# EAGLE board Cree_XP-E_Turn (EAGLE 6.4)
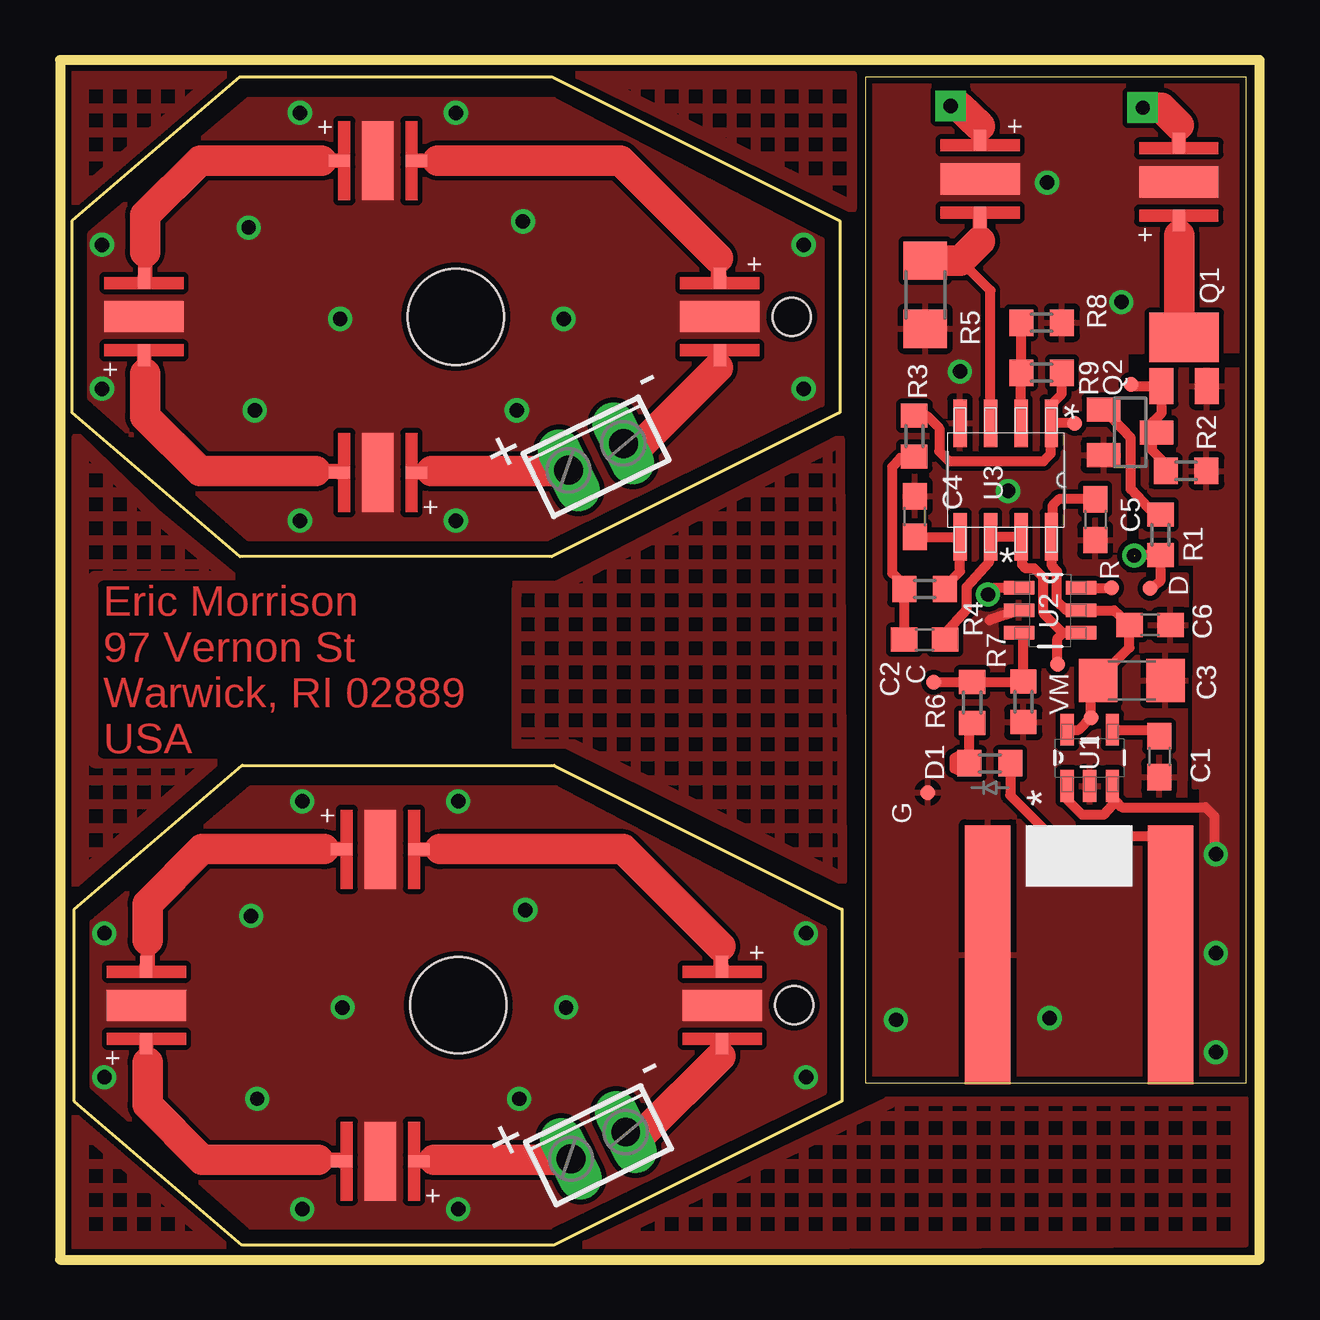
[diagram p0: board, top side]
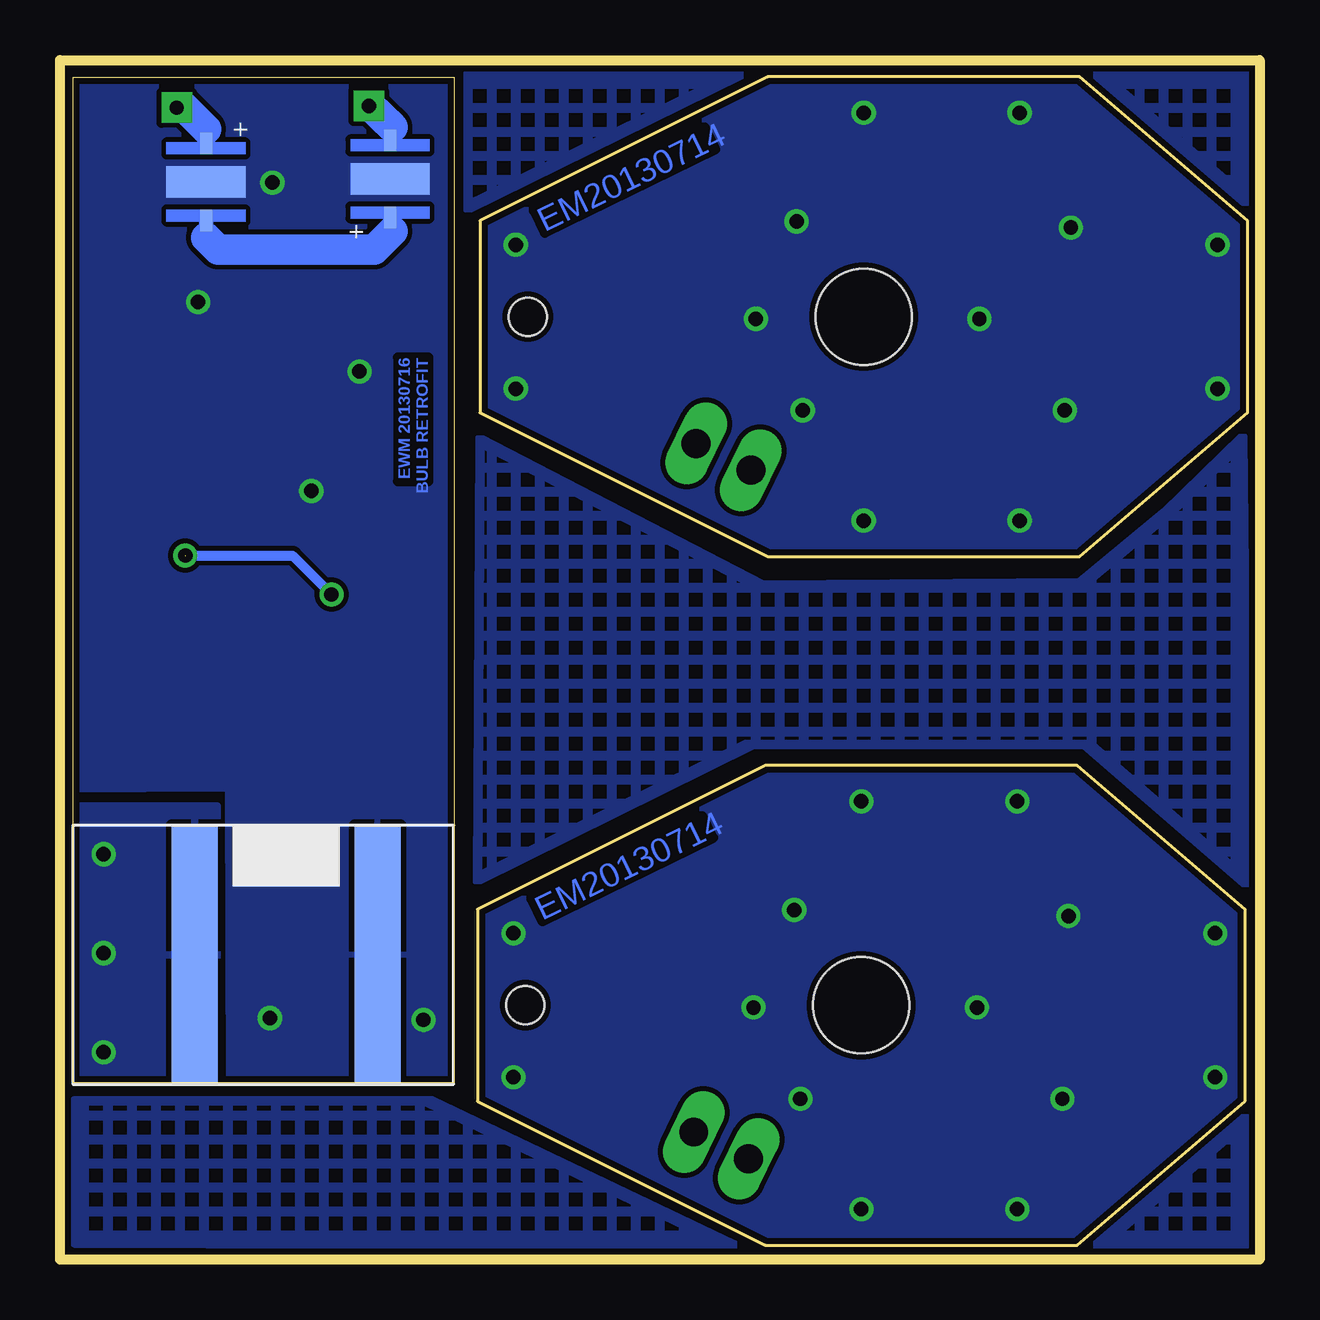
[diagram p1: board, bottom side, seen from below]

Size 50 x 50 mm. Coordinates in mm from the lower left corner, seen from the top.
Outline: 7.6,0.6 0.6,6.6 0.6,14.6 7.6,20.6 20.6,20.6 32.6,14.6 32.6,6.6 20.6,0.6 7.6,0.6
Outline: 0,0 50,0 50,50 0,50 0,0
Outline: 7.5,29.3 0.5,35.3 0.5,43.3 7.5,49.3 20.5,49.3 32.5,43.3 32.5,35.3 20.5,29.3 7.5,29.3
Outline: 49.45,7.37 49.45,49.28 33.58,49.28 33.58,7.37 49.45,7.37
Copper layers (1*16): Top 0.035mm / dielectric 1.5mm / Bottom 0.035mm
Design rules "default *": minimum track width 10mil, minimum drill 24mil, track to track 8mil, track to pad 8mil, pad to pad 8mil, via to via 8mil, smd to smd 8mil, copper to edge 10mil, drill to drill 10mil, minimum pad ring 10mil, minimum via ring 8mil, stop-mask expansion 4mil, vias tented up to drill 0mil, thermal gap 10mil
Holes 4 mm at 16.6,10.6 16.5,39.3
Holes 1.59 mm at 30.6,10.6 30.5,39.3

## Footprints (pad centres in the part's own frame; a part is rotated, then mirrored left to right if it is on the bottom)
TPI_PAD = smd 0.635 x 0.635: P$1 0,0
C0603 = smd 1.1 x 1: 1 -0.85,0; 2 0.85,0
C1206 = smd 1.6 x 1.8: 1 -1.4,0; 2 1.4,0
D0603 = smd 1 x 1.1: 1A -0.85,0; 2C 0.85,0
CREE_XP-E = smd 0.9 x 0.5: AN -1.6,0; CT 1.6,0 | smd 1.3 x 3.3: TH 0,0
SOT-23_POWER = smd 1 x 1.5: P$1 -0.95,-2.025; P$2 0.95,-2.025 | smd 2.9 x 2.05: P$3 0,0
SOT23 = smd 1 x 1.4: 1 -0.95,-1.1; 2 0.95,-1.1; 3 0,1.1
R0603 = smd 1 x 1.1: 1 -0.85,0; 2 0.85,0
R1206 = smd 1.6 x 1.803: 1 -1.422,0; 2 1.422,0
SOT95P280X145-5N = smd 1.321 x 0.559: 1 -1.168,0.94; 2 -1.168,0; 3 -1.168,-0.94; 4 1.168,-0.94; 5 1.168,0.94
SOT95P280X145-6N = smd 1.27 x 0.559: 1 -1.295,0.94; 2 -1.295,0; 3 -1.295,-0.94; 4 1.295,-0.94; 5 1.295,0; 6 1.295,0.94
SOIC8-N_MC = smd 1.981 x 0.559: 1 -2.362,1.905; 2 -2.362,0.635; 3 -2.362,-0.635; 4 -2.362,-1.905; 5 2.362,-1.905; 6 2.362,-0.635; 7 2.362,0.635; 8 2.362,1.905
TAILLIGHT = smd 1.905 x 10.795 bottom: H1 -4.763,0; L2 2.857,0 | smd 1.905 x 10.795: H2 4.763,0; L1 -2.857,0
2POL254 = drill 1.2 long: 1 -1.27,0; 2 1.27,0

## Placement (x,y rotation side)
+5V  TPI  [TPI_PAD]  42.98,22.59 90 top
C1  10n  [C0603]  45.82,20.96 270 top
C2  .1u  [C0603]  36.04,25.84 180 top
C3  47u  [C1206]  44.68,24.14 0 top
C4  .1u  [C0603]  35.63,30.97 90 top
C5  .1u  [C0603]  43.15,30.84 270 top
C6  .1u  [C0603]  45.44,26.45 0 top
D1  DIODE_0603  [D0603]  38.76,20.68 180 top
DRILEGEND  [DRILEGEND]  -0.2,-4.01 0 top  (outside the outline)
GND  TPI  [TPI_PAD]  36.17,19.46 90 top
LED1  LUXEON_REBELCREE_XP-E  [CREE_XP-E]  27.6,10.6 270 top
LED2  LUXEON_REBELCREE_XP-E  [CREE_XP-E]  13.35,17.1 0 top
LED3  LUXEON_REBELCREE_XP-E  [CREE_XP-E]  3.6,10.6 90 top
LED4  LUXEON_REBELCREE_XP-E  [CREE_XP-E]  13.35,4.1 180 top
LED5  LUXEON_REBELCREE_XP-E  [CREE_XP-E]  27.5,39.3 270 top
LED6  LUXEON_REBELCREE_XP-E  [CREE_XP-E]  13.25,45.8 0 top
LED7  LUXEON_REBELCREE_XP-E  [CREE_XP-E]  3.5,39.3 90 top
LED8  LUXEON_REBELCREE_XP-E  [CREE_XP-E]  13.25,32.8 180 top
LED9  LUXEON_REBELCREE_XP-E  [CREE_XP-E]  46.63,44.91 90 top
LED10  LUXEON_REBELCREE_XP-E  [CREE_XP-E]  43.91,44.91 270 bottom
LED11  LUXEON_REBELCREE_XP-E  [CREE_XP-E]  36.24,45.04 90 bottom
LED12  LUXEON_REBELCREE_XP-E  [CREE_XP-E]  38.35,45.04 270 top
MEASURE  TPI  [TPI_PAD]  41.58,24.82 90 top
OUTA  TPI  [TPI_PAD]  42.29,34.85 90 top
PWM  TPI  [TPI_PAD]  44.65,36.48 90 top
Q1  SI2301CDS  [SOT-23_POWER]  46.86,38.44 0 top
Q2  BC846  [SOT23]  44.6,34.47 270 top
R1  10k  [R0603]  45.87,30.21 90 top
R2  1k  [R0603]  46.94,32.87 180 top
R3  3.9k  [R0603]  35.61,34.32 270 top
R4  3.9k  [R0603]  36.04,27.95 0 top
R5  .1  [R1206]  36.07,40.21 90 top
R6  3.3k  [R0603]  38.02,23.22 270 top
R7  1k  [R0603]  40.16,23.25 270 top
R8  1k  [R0603]  40.92,39.05 0 top
R9  28.7K  [R0603]  40.92,36.96 180 top
RESET  TPI  [TPI_PAD]  43.84,28 90 top
TPICLK  TPI  [TPI_PAD]  36.42,24.06 90 top
TPIDATA  TPI  [TPI_PAD]  45.44,27.97 90 top
U1  SPX5205M5-L-3-3  [SOT95P280X145-5N]  42.92,20.91 90 top
U2  ATTINY5-TSHR  [SOT95P280X145-6N]  41.27,27.06 0 top
U3  MCP6L2-X_SN  [SOIC8-N_MC]  39.42,32.49 270 top
U$1  CON_TAILLIGHT  [TAILLIGHT]  41.53,12.71 0 bottom
X1  [2POL254]  22.44,4.76 26 top
X2  [2POL254]  22.34,33.46 26 top

## Library data of the parts
+5V GND MEASURE OUTA PWM RESET TPICLK TPIDATA = Personal
C1 = resistor; DIGIKEY: 445-1311-1-ND; DIGIKEY_COST: .10
C2 C4-C6 = resistor; DIGIKEY: 445-1316-1-ND; DIGIKEY_COST: .10
C3 = resistor; DIGIKEY: 399-5508-1-ND; DIGIKEY_COST: .67
D1 = Combined; DIGIKEY: 641-1002-1-ND; DIGIKEY_COST: .23
DRILEGEND = drilegend
LED1-LED12 U$1 = Combined
Q1 = Combined; DIGIKEY: 568-6956-1-ND; DIGIKEY_COST: .69; NEWARK: 16P3701; NEWARK_COST: .37
Q2 = transistor-neu-to92; DIGIKEY: BC846BMTFCT-ND; DIGIKEY_COST: .17; NEWARK: 75R0728; NEWARK_COST: .14
R1 = resistor; DIGIKEY: RMCF0603FT10K0CT-ND; DIGIKEY_COST: .04
R2 R7 R8 = resistor; DIGIKEY: RMCF0603FT1K00CT-ND; DIGIKEY_COST: .04
R3 R4 = resistor; DIGIKEY: RMCF0603FT3K90CT-ND; DIGIKEY_COST: .04
R5 = resistor; DIGIKEY: A103268CT-ND; DIGIKEY_COST: .13
R6 = resistor; DIGIKEY: RMCF0603FT3K30CT-ND; DIGIKEY_COST: .04
R9 = resistor; DIGIKEY: RMCF0603FT28R7CT-ND; DIGIKEY_COST: .04
U1 = Exar_By_element14_Batch_1; DIGIKEY: 1016-1251-ND; DIGIKEY_COST: .60; MPN: SPX5205M5-L-3-3; OC_FARNELL: 1831954; OC_NEWARK: 23R9851; PACKAGE: SOT-23-5; SUPPLIER: EXAR
U2 = Atmel_By_element14_Batch_1; DESCRIPTION: Microcontroller; DIGIKEY: ATTINY10-TSHRCT-ND; DIGIKEY_COST: .69; MPN: ATTINY5-TSHR; OC_FARNELL: 1841626; OC_NEWARK: 12T1342; PACKAGE: SOT563-6; SUPPLIER: ATMEL
U3 = Combined; DIGIKEY: MCP6L2T-E/SNCT-ND; DIGIKEY_COST: .64
X1 X2 = con-phoenix-254; OC_FARNELL: unknown; OC_NEWARK: unknown

## Nets
+14V: Q1.P$2 R2.1 U1.1 U1.3 U$1.L1
BLINK: R6.1 R7.1 TPICLK.P$1 U2.3
CROSSOVER: LED10.CT LED11.AN
D-: LED12.CT R5.2 U3.3
GND: C1.2 C3.2 C4.2 C5.2 C6.2 GND.P$1 LED9.TH LED10.TH LED11.TH LED12.TH Q2.2 R5.1 R7.2 R8.2 U1.2 U2.2 U3.4 U$1.H2 U$1.L2
INA-: R8.1 R9.2 U3.2
INB+: C4.1 R4.2 U3.5
MEASURE: C2.1 MEASURE.P$1 U2.4 U3.6 U3.7
MOSFET: R1.1 TPIDATA.P$1 U2.1
N$1: LED5.AN LED6.CT
N$2: LED1.AN LED2.CT
N$3: LED2.AN LED3.CT
N$4: LED3.AN LED4.CT
N$5: LED6.AN LED7.CT
N$6: LED7.AN LED8.CT
N$7: C1.1 U1.4
N$8: PWM.P$1 Q1.P$1 Q2.3 R2.2
N$9: Q2.1 R1.2
N$10: C2.2 R3.2 R4.1
N$11: D1.1A U$1.H1
N$12: D1.2C R6.2
N$13: LED11.CT LED12.AN
N$14: LED9.AN Q1.P$3
N$15: LED9.CT LED10.AN
OUTA: OUTA.P$1 R3.1 R9.1 U3.1
RESET: RESET.P$1 U2.6
THERMAL: LED1.TH LED2.TH LED3.TH LED4.TH
THERMAL1: LED5.TH LED6.TH LED7.TH LED8.TH
V+: LED4.AN X1.1
V+1: LED8.AN X2.1
V-: LED1.CT X1.2
V-1: LED5.CT X2.2
VCC: +5V.P$1 C3.1 C5.1 C6.1 U1.5 U2.5 U3.8

## Tracks (layer width: path | path; a pad name or v marks a point on that pad's centre or on a via)
+14V  (via drill 0.6)
  Top 0.406: U1.3 43.86,19.26 44.02,19.11 | 44.02,19.11 44.27,18.85 47.75,18.85 48.11,18.5 48.11,16.97 v48.18,16.9 | U1.1 41.98,19.16 42.59,18.55 43.51,18.55 44.02,19.11
  other vias: 48.18,8.64 48.18,12.77
  pour Top: 47.62,7.3 47.62,19.72 47.29,19.69 47.37,29.04 45.11,29.04 45.08,31.22 45.16,33.53 45.11,37.06 49.6,37.09 49.55,7.25
  pour Bottom: 43.46,7.04 43.46,18.9 49.73,18.9 49.73,7.07 45.97,7.04
BLINK
  Top 0.406: 40.16,26.14 U2.3 40.16,26.12 R7.1 40.13,24.07 R6.1 36.42,24.07 TPICLK.P$1
CROSSOVER
  Bottom 0.61: LED11.AN 36.14,42.86 | 43.91,42.6 LED10.CT
  Bottom 1.27: 36.14,42.86 36.9,42.09 43.41,42.09 43.91,42.6
D-
  Top 0.406: U3.3 38.78,40.39 37.51,41.66 36.09,41.66 R5.2
  Top 0.61: LED12.CT 38.35,42.45
  Top 1.27: 38.35,42.45 37.54,41.64 R5.2
GND  (via drill 0.6)
  Top 0.406: U2.2 38.76,26.65
  other vias: 39.52,32.04 37.51,37.01 44.24,39.91 41.15,44.89 34.85,9.99 41.25,10.06
  pour Top: 33.6,7.37 33.55,49.28 40.71,49.31 43.84,49.36 44.93,49.33 49.43,49.28 49.48,37.88 45.11,37.85 44.4,37.83 44.4,35.77 44.32,28.53 46.94,28.53 46.86,18.22 47.17,18.22 47.14,7.35
  pour Bottom: 33.36,7.08 33.31,49.54 49.65,49.59 49.8,19.6 43.02,19.64 42.98,7.04
INA-
  Top 0.406: U3.2 40.05,36.95 R9.2 R8.1
INB+
  Top 0.406: 37.48,30.09 U3.5 | C4.1 37.5,30.12 U3.5 | R4.2 36.89,28.06 37.51,28.68 U3.5
MEASURE
  Top 0.406: U2.4 41.81,26.12 | 41.81,26.12 40.99,26.93 40.99,28.43 40.61,28.81 40.26,28.81 40.1,28.96 40.1,30.08 U3.7 U3.6 38.73,30.08 38.73,29.09 37.79,28.05 37.79,27.11 36.89,26.1 C2.1 | MEASURE.P$1 41.58,25.89 41.81,26.12
MOSFET  (via drill 0.6)  (1 unrouted)
  Top 0.406: TPIDATA.P$1 45.86,28.26 R1.1 44.82,29.36 44.78,29.32 | U2.1 38.96,28 v38.68,27.72
  Bottom 0.406: v44.78,29.34 40.31,29.34 v38.68,27.72
N$1
  Top 0.61: LED5.AN 27.42,40.98 27.42,41.75 | 15.74,45.81 15.73,45.8 LED6.CT
  Top 1.27: 27.42,41.75 23.36,45.81 15.74,45.81
N$2
  Top 0.61: LED1.AN 27.52,12.28 27.52,13.05 | 15.84,17.11 15.83,17.1 LED2.CT
  Top 1.27: 27.52,13.05 23.46,17.11 15.84,17.11
N$3
  Top 0.61: LED2.AN 11.01,17.11 | 3.65,13.3 3.65,12.25 LED3.CT
  Top 1.27: 11.01,17.11 5.93,17.11 3.65,14.82 3.65,13.3
N$4
  Top 0.61: LED3.AN 3.6,8.27 3.65,8.22 | 10.76,4.16 11.69,4.16 LED4.CT
  Top 1.27: 3.65,8.22 3.65,6.44 5.93,4.16 10.76,4.16
N$5
  Top 0.61: LED6.AN 10.91,45.81 | 3.55,42 3.55,40.95 LED7.CT
  Top 1.27: 10.91,45.81 5.83,45.81 3.55,43.52 3.55,42
N$6
  Top 0.61: LED7.AN 3.5,36.97 3.55,36.92 | 10.66,32.86 11.59,32.86 LED8.CT
  Top 1.27: 3.55,36.92 3.55,35.14 5.83,32.86 10.66,32.86
N$7
  Top 0.406: 46.11,21.95 C1.1 45.55,22.08 U1.4
N$8
  Top 0.406: R2.2 46.11,33.14 45.54,33.71 45.54,34.31 Q2.3 45.55,34.91 45.92,35.29 Q1.P$1 44.65,36.41 PWM.P$1
N$9
  Top 0.406: R1.2 45.6,31.06 44.63,32.11 44.63,34.25 Q2.1
N$10
  Top 0.406: C2.2 R4.1 35.19,28.14 34.7,28.61 34.7,33.05 35.02,33.41 35.55,33.41 R3.2
N$11
  Top 0.406: D1.1A 39.61,19.35 41.3,17.66 46.1,17.66 46.33,17.43 46.33,12.74 U$1.H1
N$12
  Top 0.406: D1.2C 37.91,22.26 R6.2
N$13  (via drill 0.6 pad 1.27)
  Top 0.61: LED12.AN 38.35,47.25
  Top 1.27: 38.35,47.25 37.46,48.06 v37.13,48.09
  Bottom 0.61: LED11.CT 36.14,47.2
  Bottom 1.27: 36.14,47.2 37.08,48.09 v37.13,48.09
N$14
  Top 0.61: LED9.AN 46.63,42.73 46.66,42.7
  Top 1.27: 46.66,42.7 46.66,38.64 Q1.P$3
N$15  (via drill 0.6 pad 1.27)
  Top 0.61: LED9.CT 46.63,47.27
  Top 1.27: 46.63,47.27 45.9,48.01 v45.13,48.01
  Bottom 0.61: LED10.AN 43.91,47.12
  Bottom 1.27: 43.91,47.12 44.8,48.01 v45.13,48.01
OUTA
  Top 0.406: R3.1 36.13,35.17 36.65,34.65 36.65,33.69 37.06,33.28 40.99,33.28 41.3,33.59 41.3,34.83 U3.1 | U3.1 41.32,35.64 41.76,36.07 41.76,36.95 R9.1 | OUTA.P$1 U3.1
RESET
  Top 0.406: U2.6 RESET.P$1
S$1
  pour Bottom (hatched): 4,31.1 7.5,28.2 20.7,28.1 32.5,34.2 32.6,15.8 21.1,21.5 7.3,21.5 0.5,15.6 0.7,34.3
  pour Top (hatched): 4,31.1 7.5,28.2 20.7,28.1 32.5,34.2 32.6,15.8 21.1,21.5 7.3,21.5 0.5,15.6 0.7,34.3
S$2
  pour Top (hatched): 21.9,0.6 34.5,6.6 49.4,6.6 49.4,0.7
  pour Bottom (hatched): 21.9,0.6 34.5,6.6 49.4,6.6 49.4,0.7
S$3
  pour Top (hatched): 0.5,6.1 7,0.5 0.6,0.6
  pour Bottom (hatched): 0.5,6.1 7,0.5 0.6,0.6
S$4
  pour Top (hatched): 0.5,49.5 7,49.5 0.5,43.9
  pour Bottom (hatched): 0.5,49.5 7,49.5 0.5,43.9
S$5
  pour Top (hatched): 21.6,49.4 33,49.4 33,43.8
  pour Bottom (hatched): 21.6,49.4 33,49.4 33,43.8
THERMAL  (via drill 0.6)
  other vias: 7.97,14.32 19.4,14.57 11.78,10.51 8.22,6.7 21.09,10.51 19.14,6.7 31.1,13.6 31.1,7.6 10.1,19.1 16.6,19.1 16.6,2.1 10.1,2.1 1.85,7.6 1.85,13.6
  pour Top: 1.36,7.2 1.36,14.06 7.97,19.65 20.67,19.65 31.84,13.81 31.84,6.95 20.41,1.36 7.97,1.36
  pour Bottom: 0.35,6.44 0.35,14.82 7.46,20.92 20.92,20.92 32.86,14.82 32.86,6.44 20.67,0.35 7.46,0.35
THERMAL1  (via drill 0.6)
  other vias: 7.87,43.02 19.3,43.27 11.68,39.21 8.12,35.4 20.99,39.21 19.04,35.4 31,42.3 31,36.3 10,47.8 16.5,47.8 16.5,30.8 10,30.8 1.75,36.3 1.75,42.3
  pour Top: 1.26,35.9 1.26,42.76 7.87,48.35 20.57,48.35 31.74,42.51 31.74,35.65 20.31,30.06 7.87,30.06
  pour Bottom: 0.25,35.14 0.25,43.52 7.36,49.62 20.82,49.62 32.76,43.52 32.76,35.14 20.57,29.05 7.36,29.05
V+
  Top 0.61: LED4.AN 15.53,4.1 15.59,4.16
  Top 1.27: 15.59,4.16 21.25,4.16 X1.1
V+1
  Top 0.61: LED8.AN 15.43,32.8 15.49,32.86
  Top 1.27: 15.49,32.86 21.16,32.86 X2.1
V-
  Top 0.61: LED1.CT 27.52,8.92 27.52,8.47
  Top 1.27: 27.52,8.47 24.36,5.32 X1.2
V-1
  Top 0.61: LED5.CT 27.42,37.62 27.42,37.17
  Top 1.27: 27.42,37.17 24.27,34.02 X2.2
VCC
  Top 0.406: C5.1 41.64,31.69 41.38,31.43 41.38,30.18 U3.8 41.35,30.11 41.35,28.91 41.55,28.68 41.55,27.44 41.96,27.06 U2.5 43.93,27.06 C6.1 44.58,26.43 44.58,25.51 43.28,24.21 C3.1 42.98,23.83 +5V.P$1 42.47,22.08 U1.5

## Text on the board
Top: Eric Morrison / 97 Vernon St / Warwick, RI 02889 / USA
Bottom: EM20130714 | EWM 20130716 / BULB RETROFIT | EM20130714
tPlace: - | + | - | +
_tNames: R5 | Q1 | R8 | R3 | R9 | Q2 | R2 | C4 | U3 | R1 | C5 | R | D | R4 | U2 | C6 | C2 | R7 | C | M | V | C3 | R6 | D1 | C1 | U1 | G